# Altium PCB Upsilon_Bopit_Project.PcbDoc
Units mil, origin at the board's own origin, x right, y up, seen from the top; angles counter-clockwise.
Board outline 3000 x 3010 mil, 2 copper layers (Top Layer, Bottom Layer); 25 components, 19 nets, 91 pads, 1 vias.
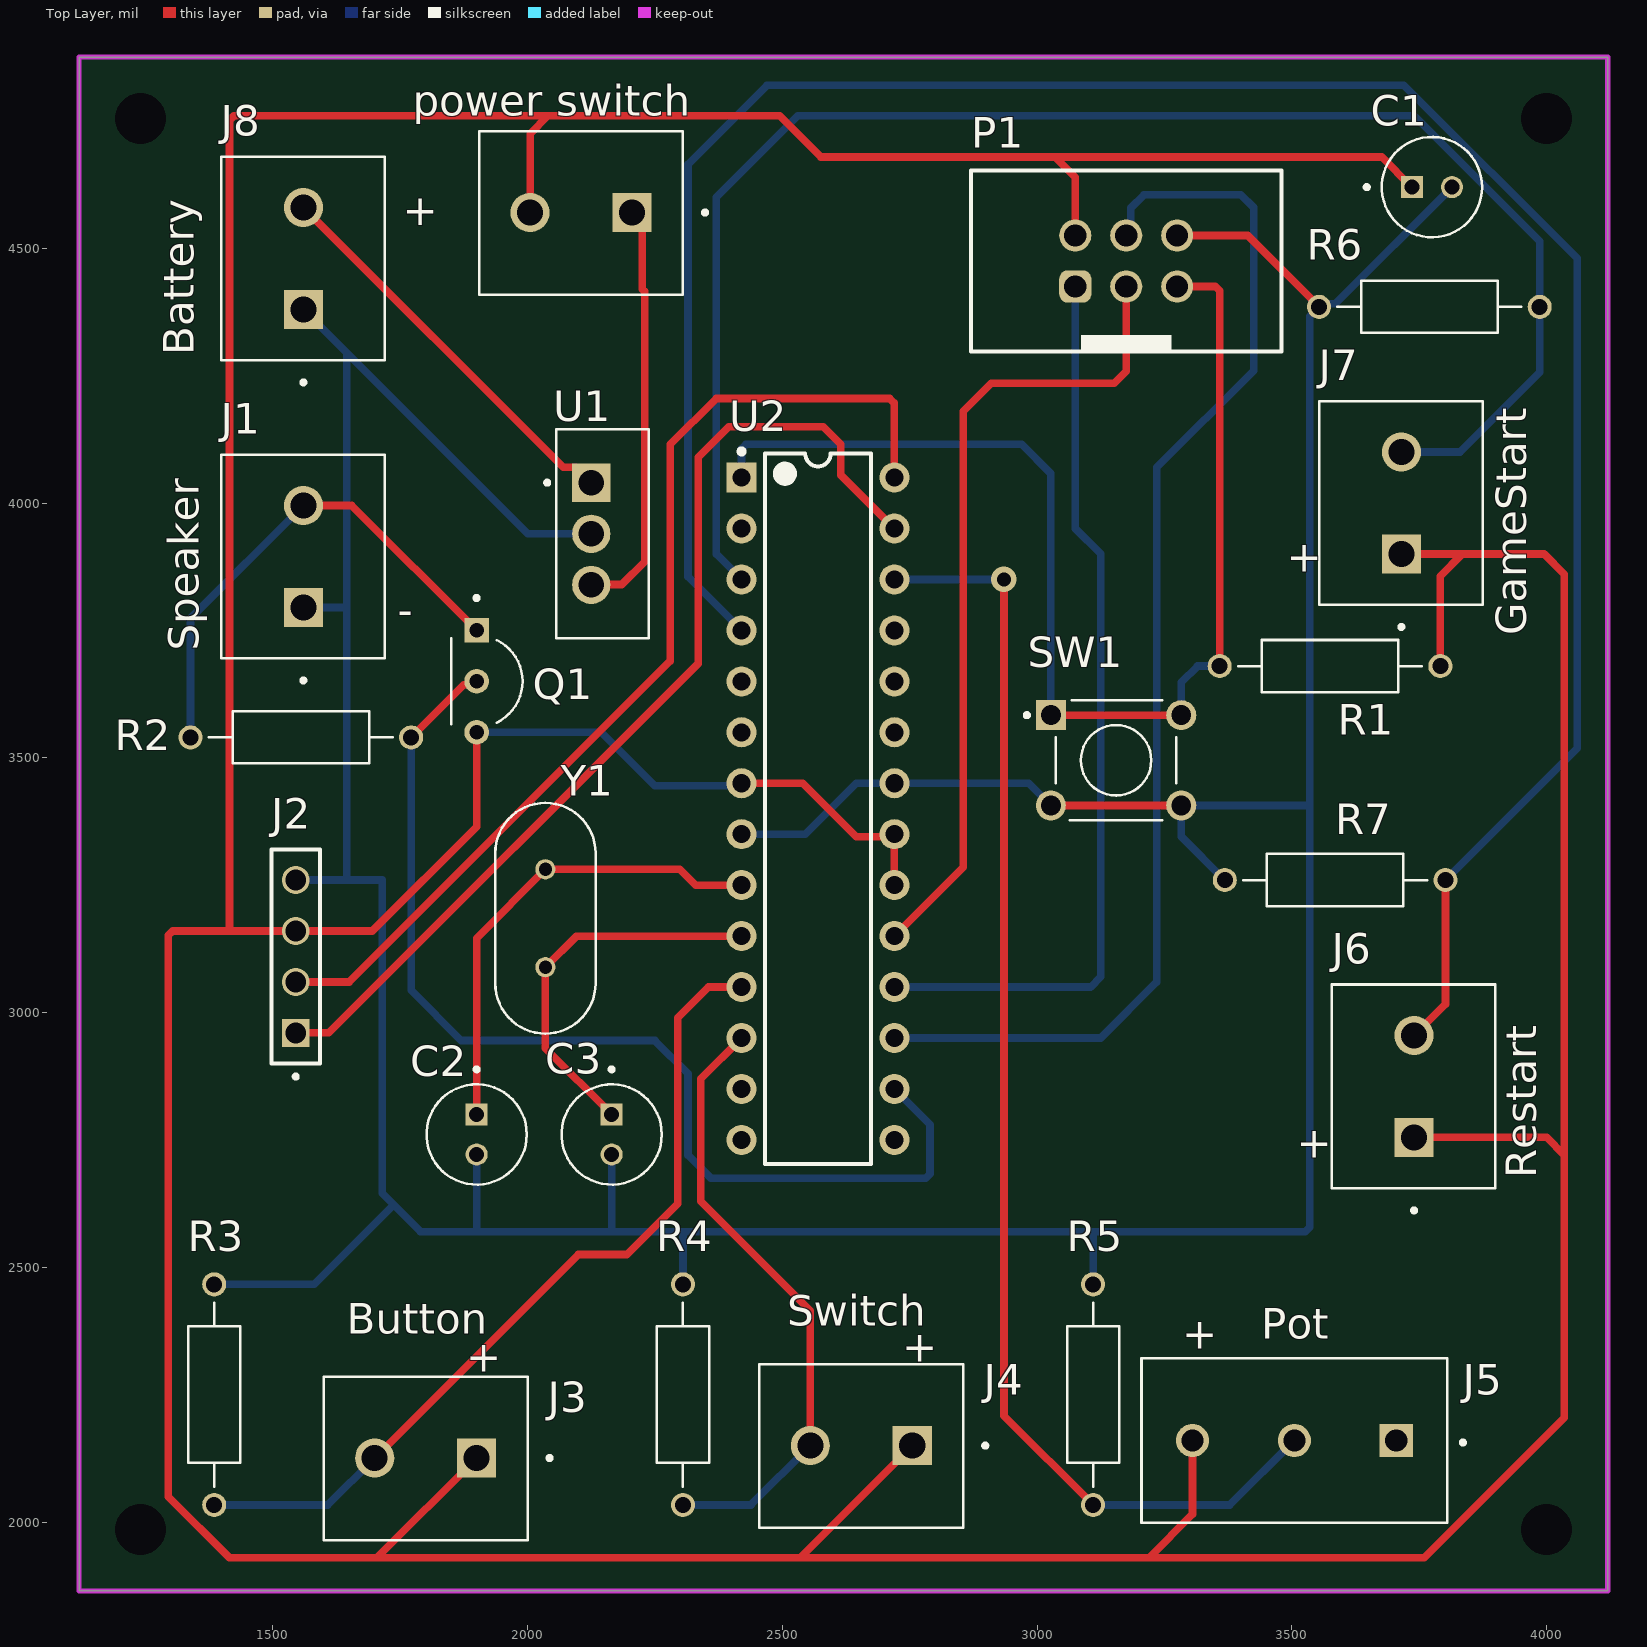
[diagram p0: Top Layer view]
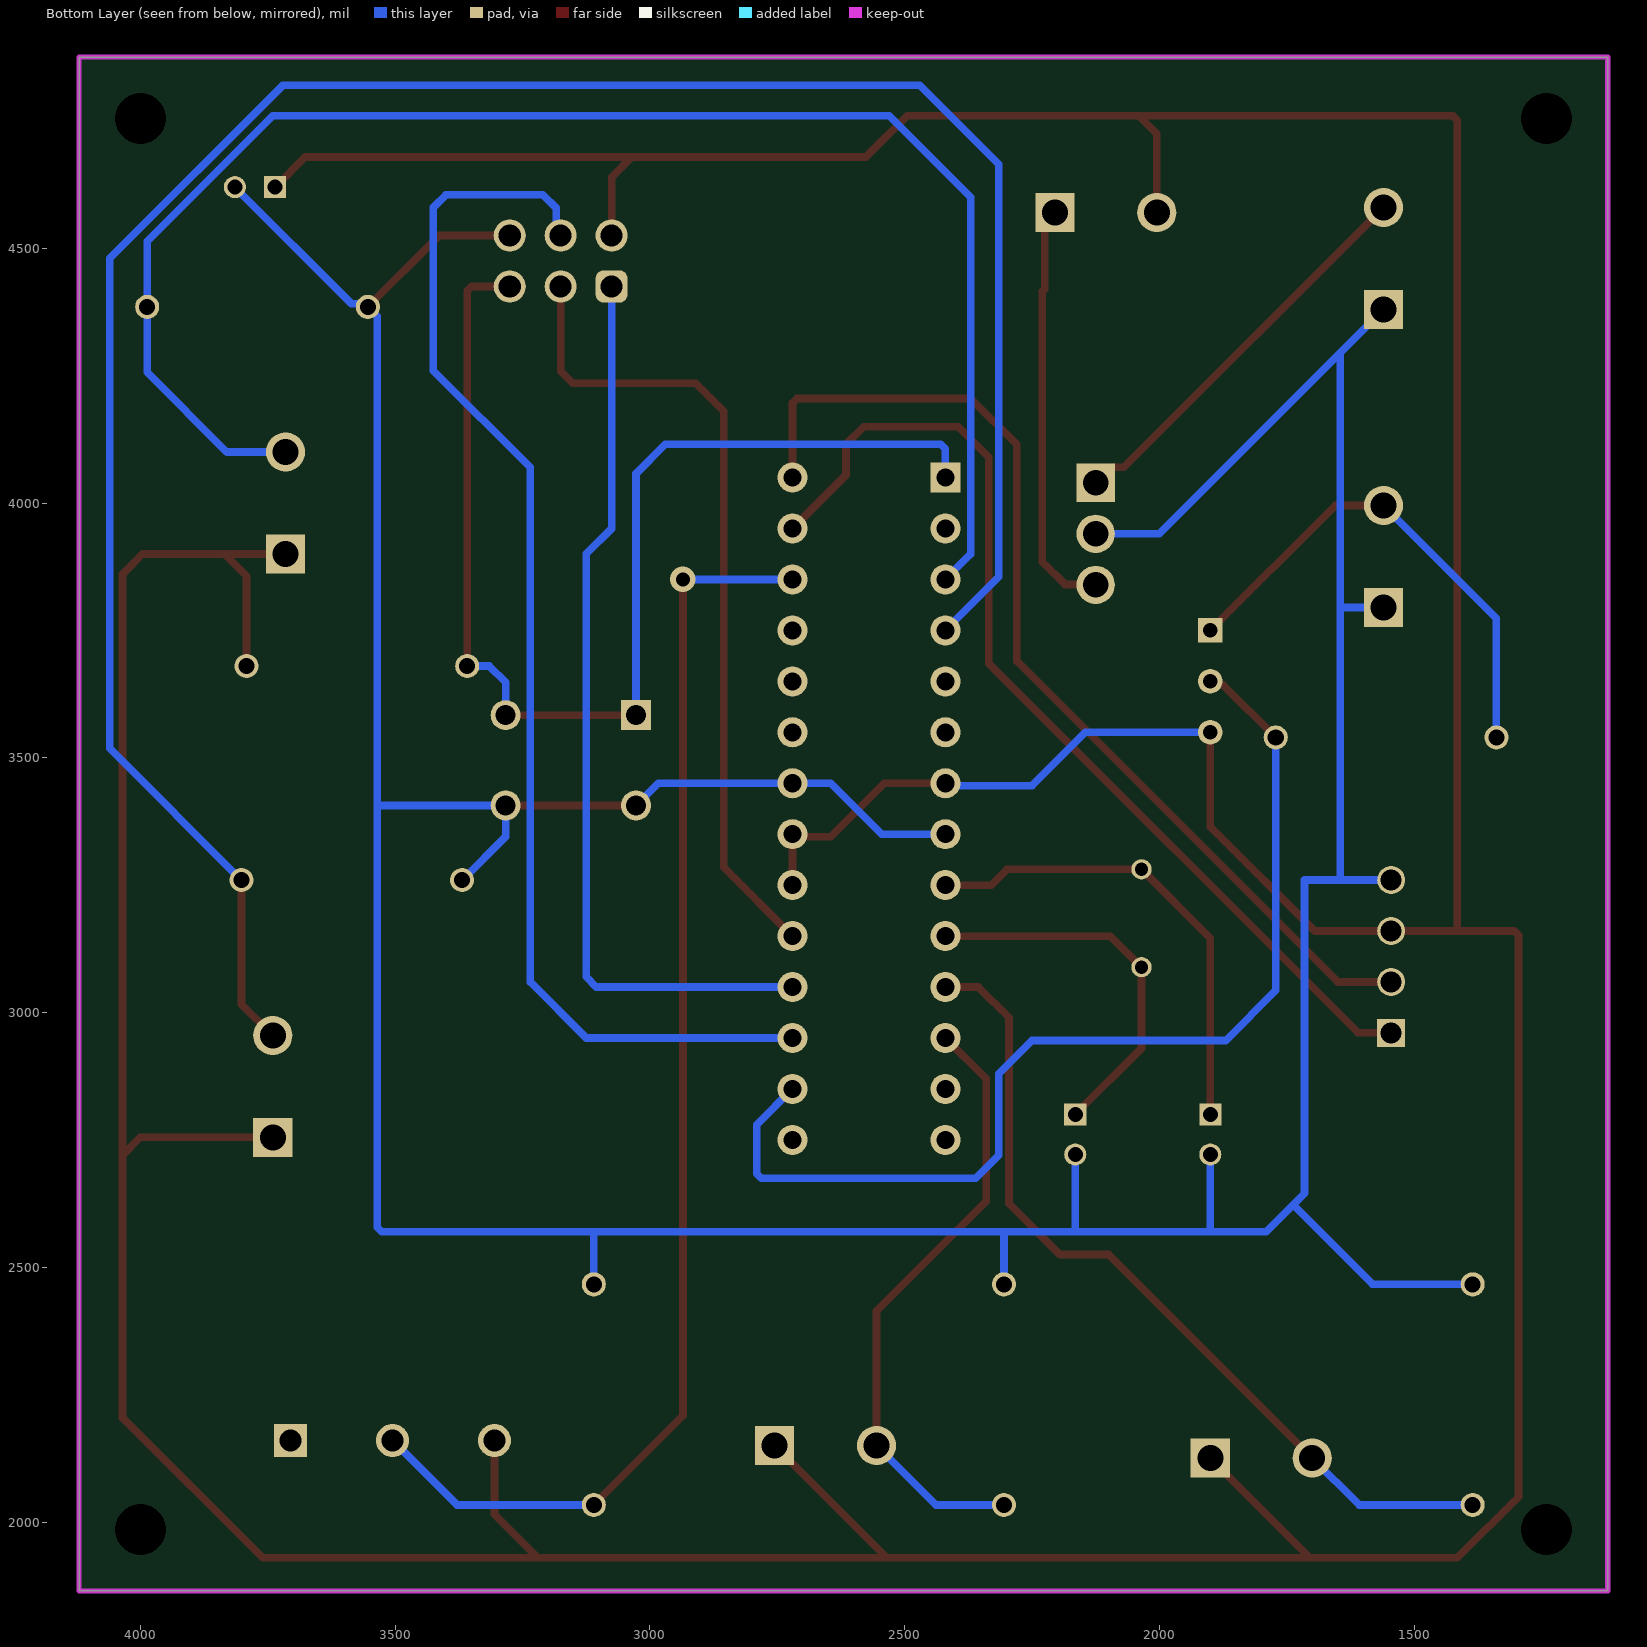
[diagram p1: Bottom Layer view, seen from below]
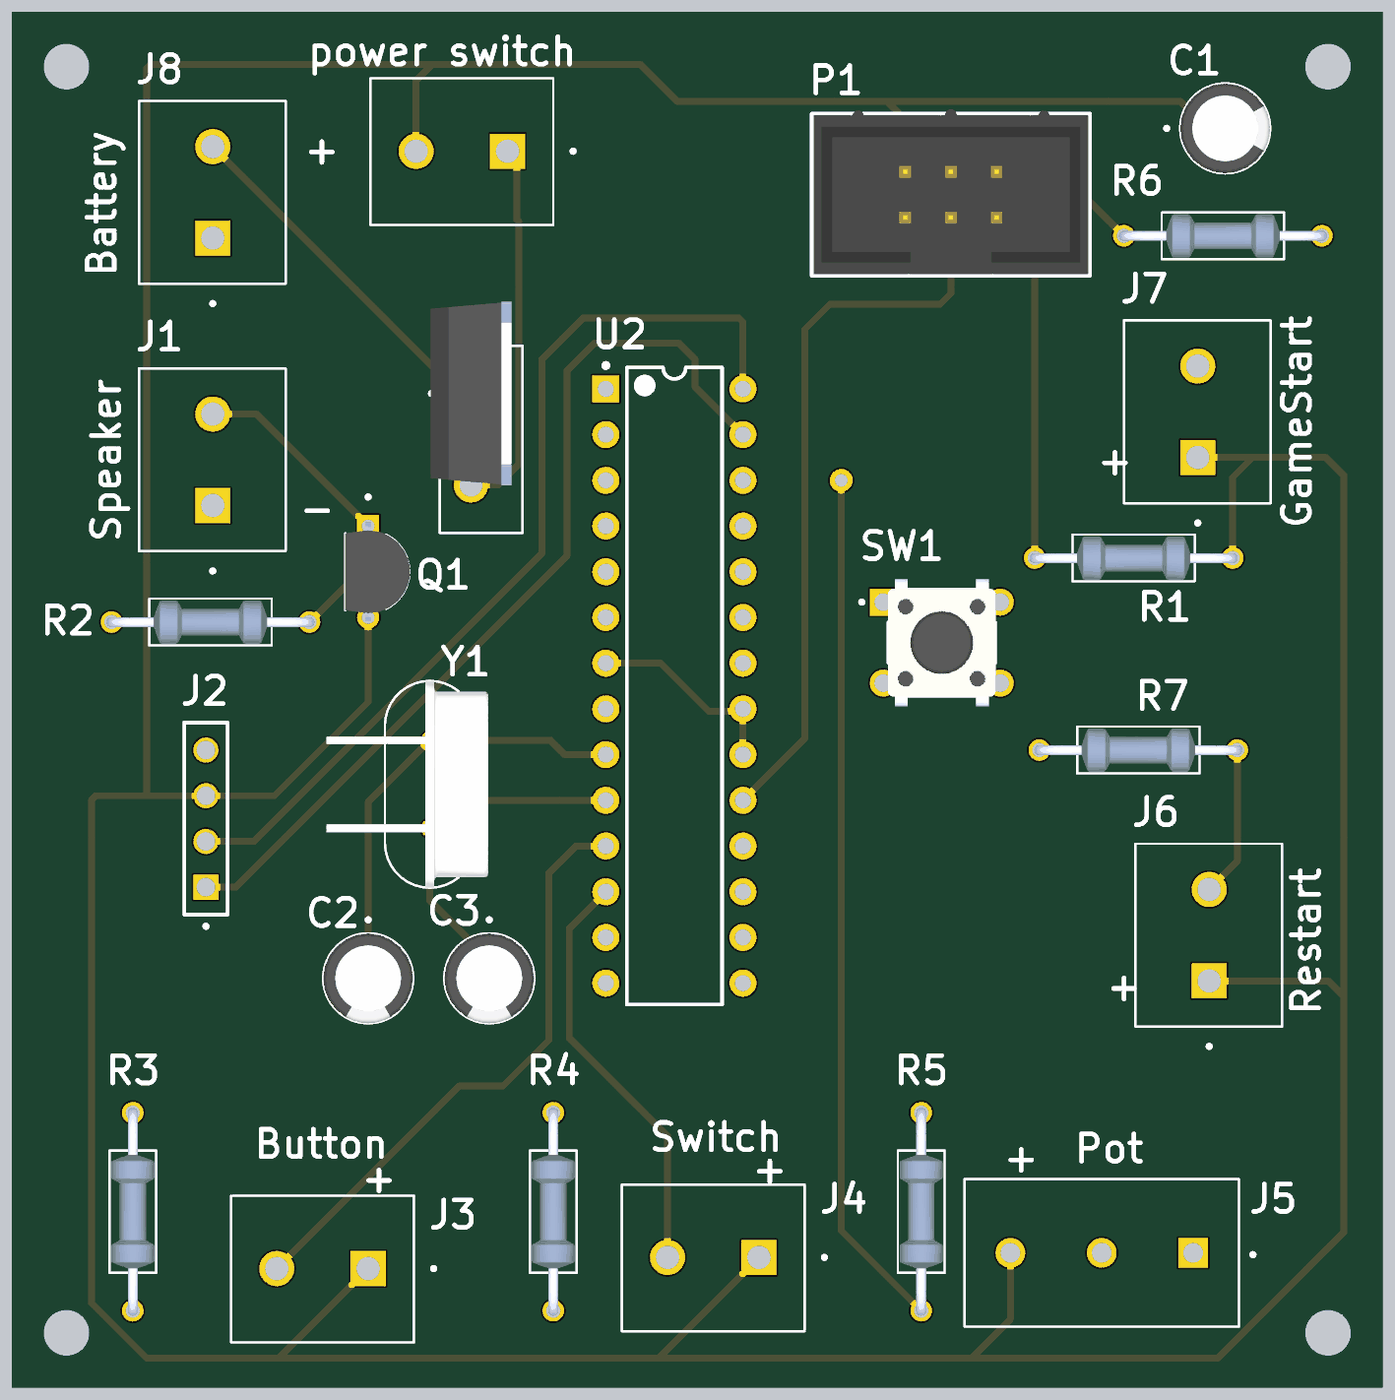
[diagram p2: 3D render of the assembled board from above, using the file's embedded part models]

## Layer stack, top to bottom
Top Solder: solder mask 0.4, Solder Resist, Dk 3.5
Top Layer: signal copper 1.4
Dielectric 1: dielectric 12.6, FR-4, Dk 4.8
Bottom Layer: signal copper 1.4
Bottom Solder: solder mask 0.4, Solder Resist, Dk 3.5

## Board outline
1120,1865 1120,4875 4120,4875 4120,1865

## Design rules (kind name [scope] priority, off if disabled: settings)
BoardOutlineClearance [All] p1: gap=7.87 ignorepadtopadclearanceinfootprint=FALSE except(15.75: Arc-SplitBarrior Arc-SplitContinuation Track-SplitBarrior Track-SplitContinuation SMDPad-SplitBarrior SMDPad-SplitContinuation THPad-SplitBarrior THPad-SplitContinuation Via-SplitBarrior Via-SplitContinuation Fill-SplitBarrior Fill-SplitContinuation Poly-SplitBarrior Poly-SplitContinuation Region-SplitBarrior Region-SplitContinuation Text-SplitBarrior Text-SplitContinuation)
Clearance "Clearance Bottom Layer" [OnLayer('Bottom Layer')] p1: gap=8 ignorepadtopadclearanceinfootprint=TRUE except(10: Arc-Text Track-Text SMDPad-Text THPad-Text Via-Text Fill-Text Poly-Text Region-Text Text-Text)
Clearance "Clearance Top Layer" [OnLayer('Top Layer')] p2: gap=8 ignorepadtopadclearanceinfootprint=TRUE except(10: Arc-Text Track-Text SMDPad-Text THPad-Text Via-Text Fill-Text Poly-Text Region-Text Text-Text)
Clearance [All] p3: gap=7.87 ignorepadtopadclearanceinfootprint=FALSE except(3.5: Arc-Arc Arc-Track Arc-SMDPad Track-Track Track-SMDPad SMDPad-SMDPad; 5: Arc-Via Track-Via SMDPad-Via THPad-Via Via-Via; 10: Arc-Text Track-Text SMDPad-Text THPad-Text Via-Text Fill-Text Poly-Text Region-Text Text-Text)
HoleSize [All] p1: absolutevalues=TRUE maxlimit=248.03 minlimit=7.87 maxpercent=80.000 minpercent=20.000
MinimumAnnularRing [All] p1: minimumring=3
MinimumSolderMaskSliver [All] p1: minsoldermaskwidth=3.94
PolygonConnect PolygonConnect_1 [All] p1: thpad.connectstyle=Relief thpad.reliefconductorwidth=20 thpad.reliefentries=4 thpad.polygonreliefangle="90 Angle" thpad.airgapwidth=10 smdpad.connectstyle=Relief smdpad.reliefconductorwidth=20 smdpad.reliefentries=4 smdpad.polygonreliefangle="90 Angle" smdpad.airgapwidth=10 via.connectstyle=Direct via.reliefconductorwidth=20 via.reliefentries=4 via.polygonreliefangle="90 Angle" via.airgapwidth=10
RoutingCorners [All] p1: cornerstyle=Round minsetback=100 maxsetback=100
RoutingVias [All] p1: holewidth=19.68 width=39.37 viastyle="Through Hole" minholewidth=7.87 minwidth=17.72 maxholewidth=39.37 maxwidth=78.74
SilkToSilkClearance [All] p1: silktosilkclearance=3.94
SilkToSolderMaskClearance [IsPad] p1: minsilkscreentomaskgap=3.94 clearancetoexposedcopper=TRUE
SolderMaskExpansion [All] p1: expansion=4 istentingtop=FALSE
SupplyNets "Schematic Supply Nets_2" [InNet('GND')] p1: voltage=0.000
SupplyNets "Schematic Supply Nets_1" [InNet('+5')] p2: voltage=0.000
SupplyNets "Schematic Supply Nets" [InNet('VCC')] p3: voltage=0.000
Width [All] p1: maxlimit=100 minlimit=3.5 preferedwidth=15
25 further rules are at their usual default settings.

## Components (designator, comment, footprint, x,y, rotation, side; value= is the part's Value field where it differs from the comment)
C1 "ECA1JHG100" CAPPRD200W50D500H1100 3775,4620 r0 top
C2 "ECA1JHG100" CAPPRD200W50D500H1100 1900,2760.63 r270 top
C3 "ECA1JHG100" CAPPRD200W50D500H1100 2165,2760.63 r270 top
J1 "1729128" PHOENIX_1729128 1719.45,3695 r90 top
J2 "SSW-104-02-T-S" SAMTEC_SSW-104-02-T-S 1545,2960 r90 top
J3 "1729128" PHOENIX_1729128 2000,2285 r180 top
J4 "1729128" PHOENIX_1729128 2855,2309.45 r180 top
J5 "282837-3" TE_282837-3 3505,2160 r180 top
J6 "1729128" PHOENIX_1729128 3899.45,2655 r90 top
J7 "1729128" PHOENIX_1729128 3874.45,3800 r90 top
J8 "1729128" PHOENIX_1729128 1719.45,4280 r90 top
P1 "61200621621" 61200621621 3175,4475 r0 top
"power switch" "1729128" PHOENIX_1729128 2305,4729.45 r180 top
Q1 "2N7000" TO92254P458H750-3 1900,3650 r270 top
R1 "MFR-25FRF52-10K" RESAD1100W55L680D260 3575,3680 r0 top
R2 "MFR-25FRF52-10K" RESAD1100W55L680D260 1555,3540 r180 top
R3 "MFR-25FRF52-10K" RESAD1100W55L680D260 1385,2250 r90 top
R4 "MFR-25FRF52-10K" RESAD1100W55L680D260 2305,2250 r90 top
R5 "MFR-25FRF52-10K" RESAD1100W55L680D260 3110,2250 r90 top
R6 "MFR-25FRF52-10K" RESAD1100W55L680D260 3770,4385 r180 top
R7 "MFR-25FRF52-10K" RESAD1100W55L680D260 3585,3260 r180 top
SW1 "1825910-6" SW_1825910-6-4 3155,3495 r0 top
U1 "L7805CV" TO255P1040X460X1968-3 2125,4040 r270 top
U2 "ATmega328-PU" 28P3 2570,3400 r0 top
Y1 "ABL-10.000MHZ-B2" XTAL_HC49P488W46L1150T500H350 2035,3185 r90 top

## Footprints (in the part's own frame and the unit in brackets; to place one, negate y for a bottom-side part, rotate by r counter-clockwise, add the part's x,y. Pads: shape width x height; smd on the part's side, far side on the other; paste and mask are expansions set on the pad)
28P3 [mm] "28-Pin Plastic Dual In-Line Package (PDIP)"
  rect 1.5x1.5 hole 0.9: 1(-3.81,16.51)
  round 1.5 hole 0.9: 2(-3.81,13.97) 3(-3.81,11.43) 4(-3.81,8.89) 5(-3.81,6.35) 6(-3.81,3.81) 7(-3.81,1.27) 8(-3.81,-1.27) 9(-3.81,-3.81) 10(-3.81,-6.35) 11(-3.81,-8.89) 12(-3.81,-11.43) 13(-3.81,-13.97) 14(-3.81,-16.51) 15(3.81,-16.51) 16(3.81,-13.97) 17(3.81,-11.43) 18(3.81,-8.89) 19(3.81,-6.35) 20(3.81,-3.81) 21(3.81,-1.27) 22(3.81,1.27) 23(3.81,3.81) 24(3.81,6.35) 25(3.81,8.89) 26(3.81,11.43) 27(3.81,13.97) 28(3.81,16.51)
  silkscreen extent -3.93,-17.7 2.65,17.93, body extent -3.6,-17.65 3.6,17.65, height 4.58
61200621621 [mm] "6 pins, straight, gold plating"
  rrect50% 1.6x1.6 hole 1.1: 1(-2.54,-1.27)
  round 1.6 hole 1.1: 2(-2.54,1.27) 3(0,-1.27) 4(0,1.27) 5(2.54,-1.27) 6(2.54,1.27)
  silkscreen extent -7.74,-4.5 7.74,4.5, body extent -7.64,-4.43 7.64,4.75, height 9.13
CAPPRD200W50D500H1100 [mm]
  round 1.1 hole 0.75: N(1,0)
  rect 1.1x1.1 hole 0.75: P(-1,0)
  silkscreen extent -3.35,-2.5 2.5,2.5, body extent -2.5,-2.5 2.5,2.5, height 11
PHOENIX_1729128 [mm]
  rect 1.95x1.95 / inner round 1.95 / far side rect 1.95x1.95 hole 1.3: 1(2.54,4.05)
  round 1.95 hole 1.3: 2(7.62,4.05)
  silkscreen extent -1.2,0 10.16,8.15
RESAD1100W55L680D260 [mm]
  round 1.2 hole 0.8: 1(-5.5,0) 2(5.5,0)
  silkscreen extent -4.58,-1.3 4.58,1.3, body extent -5.77,-1.2 5.77,1.2, height 2.4
SAMTEC_SSW-104-02-T-S [mm]
  rect 1.39x1.39 hole 1.04: 01(0,0)
  round 1.39 hole 1.04: 02(2.54,0) 03(5.08,0) 04(7.62,0)
  silkscreen extent -2.27,-1.21 9.15,1.21
SW_1825910-6-4 [mm]
  rect 1.498x1.498 / inner round 1.498 / far side rect 1.498x1.498 hole 0.99: 1(-3.25,2.25)
  round 1.498 hole 0.99: 2(3.25,2.25) 3(-3.25,-2.25) 4(3.25,-2.25)
  silkscreen extent -4.54,-3 3,3, body extent -3,-3.9 3,3.9, height 5.01
TE_282837-3 [mm]
  rect 1.65x1.65 hole 1.1: 1(-5.08,0)
  round 1.65 hole 1.1: 2(0,0) 3(5.08,0)
  silkscreen extent -8.5,-4.1 7.62,4.1
TO255P1040X460X1968-3 [mm]
  rect 1.91x1.91 / inner round 1.91 / far side rect 1.91x1.91 hole 1.27: 1(0,0)
  round 1.91 hole 1.27: 2(2.55,0) 3(5.1,0)
  silkscreen extent -2.65,-2.29 7.75,2.86, body extent -5.1,-2.25 5.1,2.25, height 19.68
TO92254P458H750-3 [mm]
  rect 1.228x1.228 / inner round 1.228 / far side rect 1.228x1.228 hole 0.72: 1(-2.54,0)
  round 1.228 hole 0.72: 2(0,0) 3(2.54,0)
  silkscreen extent -4.25,-1.27 2.13,2.29, body extent -2.74,-1.27 2.74,2.33, height 8.09
XTAL_HC49P488W46L1150T500H350 [mm]
  round 1.007 hole 0.657: 1(-2.44,0) 2(2.44,0)
  silkscreen extent -5.75,-2.5 5.75,2.5, body extent -5.75,-3.25 5.75,5.75, height 2.5

## Part data
C1 C2 C3: "NHG-A", Package="RADIAL-2 Panasonic", Availability="No availability data", Check_prices=https://www.snapeda.com/parts/ECA1JHG100/Panasonic/view-part/5791065/?ref=eda, MF=Panasonic, MP=ECA1JHG100, Price=None, SnapEDA_Link=https://www.snapeda.com/parts/ECA1JHG100/Panasonic/view-part/5791065/?ref=snap
J1 J3 J4 J6 J7 J8 "power switch": "PCB Terminal Screw 5.08mm 16AWG 400V 13.5A 2 Position COMBICON MKDSN Series", Package=None, Check_prices=https://www.snapeda.com/parts/1729128/Phoenix+Contact/view-part/?ref=eda, MF="Phoenix Contact", MP=1729128, SnapEDA_Link=https://www.snapeda.com/parts/1729128/Phoenix+Contact/view-part/?ref=snap
J2: Package=None, Availability=Unavailable, MF="Samtec Inc.", MP=SSW-104-02-T-S, Price=None
J5: "TERMI-BLOK PCB MOUNT 3P", Package=None, Availability=Unavailable, MP=282837-3, Price=None
P1: "WR-BHD Male Box Header, THT Straight, pitch 2.54mm, 2 row, 6 pin", Contact Resistance=20mOhm, Insulation Resistance=1000MOhm, Manufacturer="Wurth Elektronik", Operating Temperature Max=105°C, Operating Temperature Min=-40°C, Rated Current=3A, Withstanding Voltage=500V, Working Voltage=250V, Category="Wire-to-Board Connectors", ComponentLink1Description="Website Link", ComponentLink1URL=https://www.we-online.com/redexpert/article/61200621621?ad, ComponentLink2Description="Datasheet Link", ComponentLink2URL=https://www.we-online.com/redexpert/spec/61200621621?ad, Gender=Male, Height=9.1mm, Length=15.28mm, Manufacturer Part Number=61200621621, Match Code=WR-BHD, Mount="Through Hole", Number of Pins=6, Number of Rows=2, Orientation=Straight, Packaging=Tray, Pitch=2.54mm, Width=9.1mm
Q1: "N-Channel 60 V 200mA (Ta) Through Hole TO-92", Package="TO-226-3 NTE Electronics, Inc.", Check_prices=https://www.snapeda.com/parts/2N7000/NTE+Electronics/view-part/?ref=eda, MF="NTE Electronics, Inc.", MP=2N7000, SnapEDA_Link=https://www.snapeda.com/parts/2N7000/NTE+Electronics/view-part/?ref=snap
R1 R2 R3 R4 R5 R6 R7: "10.5 kOhms Â±1% 0.25W, 1/4W Through Hole Resistor Axial - Metal Film", Package="RADIAL-2 YAGEO", Check_prices=https://www.snapeda.com/parts/MFR-25FRF52-10K/Yageo/view-part/?ref=eda, MF=Yageo, MP=MFR-25FRF52-10K, SnapEDA_Link=https://www.snapeda.com/parts/MFR-25FRF52-10K/Yageo/view-part/?ref=snap
SW1: "Switch Push Button OFF (ON) SPST Round Button 0.05A 24VDC Momentary Contact PC Pins Thru-Hole", Package=None, Check_prices=https://www.snapeda.com/parts/1825910-6/TE+Connectivity+ALCOSWITCH+Switches/view-part/?ref=eda, Digi-Key_Part_Number=450-1650-ND, MF="TE Connectivity", MP=1825910-6, Purchase-URL=https://pricing.snapeda.com/search/part/1825910-6/?ref=eda, SnapEDA_Link=https://www.snapeda.com/parts/1825910-6/TE+Connectivity+ALCOSWITCH+Switches/view-part/?ref=snap
U1: "Linear Voltage Regulator IC Positive Fixed 1 Output 1.5A TO-220", Package="TO-220-3 STMicroelectronics", Check_prices=https://www.snapeda.com/parts/L7805CV/STMicroelectronics/view-part/?ref=eda, MF=STMicroelectronics, MP=L7805CV, SnapEDA_Link=https://www.snapeda.com/parts/L7805CV/STMicroelectronics/view-part/?ref=snap
U2: library part CMP-0095-00015-2, "8-bit AVR Microcontroller, 32KB Flash, 1KB EEPROM, 2KB SRAM, 28-pin PDIP, Industrial Grade (-40°C to 85°C)", ComponentLink1Description="Manufacturer URL", ComponentLink1URL=http://www.atmel.com/, ComponentLink2Description="ATmega48A/48PA/88A/88PA/168A/168PA/328/328P Datasheet", ComponentLink2URL=http://www.atmel.com/dyn/resources/prod_documents/8271.pdf, ComponentLink3Description="ATmega48A/48PA/88A/88PA/168A/168PA/328/328P Summary", ComponentLink3URL=http://www.atmel.com/dyn/resources/prod_documents/8271S.pdf, DatasheetVersion="revD, May-2011", PackageDescription="28-lead (0.300\"/7.62mm Wide) Plastic Dual Inline Package (PDIP)", PackageReference=28P3, PackageVersion="revB, Sep-2001", RevisionNote="DatasheetVersion updated. URLs added."
Y1: "HC/49US (AT49) MICROPROCESSOR CRYSTAL", Package=None, Availability="In Stock", Check_prices=https://www.snapeda.com/parts/ABL-10.000MHZ-B2/Abracon+LLC/view-part/?ref=eda, MF="Abracon LLC", MP=ABL-10.000MHZ-B2, Price=None, Purchase-URL=https://pricing.snapeda.com/search/part/ABL-10.000MHZ-B2/?ref=eda, SnapEDA_Link=https://www.snapeda.com/parts/ABL-10.000MHZ-B2/Abracon+LLC/view-part/?ref=snap

## Free pads (board coordinates)
  round 60 hole 100 unplated: 2(1240,1985) 3(1240,4755) 4(4000,4755) 5(4000,1985)

## Via types
v1: diameter 50, hole 28, Top Layer to Bottom Layer, 1 vias

## Nets (pads, with @x,y where several pads share a name; then routed paths per layer and width w, separated by ;. In a path a pad name is that pad's centre, name@x,y a point inside that pad or via, vN(x,y) a via of type N, cw(c..) or ccw(c..) an arc to the next point about the centre after c; other vN are vias at no path point)
+5: "power switch.2" C1.P J2.03 J3.1 J4.1 J5.3 J6.1 J7.1 P1.2 Q1.3 R1.2 U2.7 U2.20 U2.21 | length 13635.2
  Top Layer w15: J3.1 1704.45,1930 ; Q1.3 1900,3365 1695,3160 J2.03 1415,3160 ; 2005,4570 2005,4725 2040,4760 ; U2.7 2540,3450 2645,3345 2715,3345 U2.21 U2.20 ; J4.1 2535,1930 ; P1.2 3075,4639.24 3035,4679.24 ; J5.3 3305,2015 3220,1930 ; J7.1 3835,3900 ; C1.P 3676.39,4679.24 3035,4679.24 ; J6.1 4000,2755 4035,2720 ; R1.2 3791.54,3856.54 3835,3900 ; 1415,3160 1303.79,3160 1295,3151.21 1295,2050 1415,1930 1704.45,1930 ; 1415,3160 1415,4751.21 1423.79,4760 2040,4760 ; 1704.45,1930 2535,1930 ; 2040,4760 2495,4760 2575.76,4679.24 3035,4679.24 ; 2535,1930 3220,1930 ; 3220,1930 3760,1930 4035,2205 4035,2720 ; 3835,3900 3995,3900 4035,3860 4035,2720
  Bottom Layer w15: Q1.3 2145,3550 2250,3445 2415,3445 U2.7
GND: C1.N C2.N C3.N J1.1 J2.04 J8.1 P1.6 R3.2 R4.2 R5.2 R6.2 R7.2 SW1.3 SW1.4 U1.2 U2.8 U2.22 | length 9301.2
  Top Layer w15: SW1.3 SW1.4 ; P1.6 3413.46,4525 R6.2
  Bottom Layer w15: R3.2 1581.54,2466.54 1737.5,2622.5 ; J2.04 1645,3260 ; J1.1 1640,3795 1645,3790 ; J8.1 1645,4295 ; C2.N 1900,2570 ; U1.2 2000.39,3939.61 1645,4295 ; C3.N 2165,2570 ; R4.2 2305,2570 ; U2.8 2545,3350 2645,3450 U2.22 2983.46,3450 SW1.3 ; R5.2 3110,2570 ; R7.2 3282.95,3345.51 SW1.4 3533.58,3406.42 3535,3405 ; C1.N 3585.54,4391.17 3559.63,4391.17 R6.2 3535,4366.54 3535,3405 ; 1645,3260 1645,3790 ; 1645,3260 1715,3260 1715,2645 1737.5,2622.5 ; 1645,3790 1645,4295 ; 1737.5,2622.5 1790,2570 1900,2570 ; 1900,2570 2165,2570 ; 2165,2570 2305,2570 ; 2305,2570 3110,2570 ; 3110,2570 3526.21,2570 3535,2578.79 3535,3405
NetC2_P: C2.P U2.9 Y1.2 | length 946.3
  Top Layer w15: C2.P 1900,3146.06 Y1.2 2298.94,3281.06 2330,3250 U2.9 U2.9@2408.55,3250
NetC3_P: C3.P U2.10 Y1.1 | length 753.1
  Top Layer w15: C3.P 2035,2930 Y1.1 2096.06,3150 U2.10
NetJ1_2: J1.2 Q1.1 R2.2 | length 988.2
  Top Layer w15: J1.2 1655,3995 Q1.1
  Bottom Layer w15: R2.2 1338.46,3773.46 J1.2
NetJ2_01: J2.01 U2.27 | length 2023.1
  Top Layer w15: J2.01 1610,2960 2335,3685 2335,4090 2395,4150 2580,4150 2615,4115 2615,4055 U2.27
NetJ2_02: J2.02 U2.28 | length 2048.1
  Top Layer w15: J2.02 1650,3060 2280,3690 2280,4115 2370,4205 2711.21,4205 2720,4196.21 U2.28
NetJ3_2: J3.2 R3.1 U2.11 | length 1669.9
  Top Layer w15: J3.2 2099.45,2525 2195,2525 2295,2625 2295,2990 2355,3050 U2.11
  Bottom Layer w15: R3.1 1607.91,2033.46 J3.2
NetJ4_2: J4.2 R4.1 U2.12 | length 1220.5
  Top Layer w15: U2.12 2340,2870 2340,2630 2555,2415 J4.2
  Bottom Layer w15: R4.1 2438.46,2033.46 J4.2
NetJ5_2: J5.2 R5.1 U2.26 | length 2551.4
  Top Layer w15: v1(2935,3850) 2935,2208.46 R5.1
  Bottom Layer w15: U2.26 v1(2935,3850) ; R5.1 3378.46,2033.46 J5.2
NetJ6_2: J6.2 R7.1 U2.4 | length 4566.1
  Top Layer w15: J6.2 3801.54,3016.54 R7.1
  Bottom Layer w15: U2.4 2315,3855 2315,4665 2470,4820 3720,4820 4060,4480 4060,3518.46 R7.1
NetJ7_2: J7.2 R6.1 U2.3 | length 3148.9
  Bottom Layer w15: U2.3 2370,3900 2370,4600 2530,4760 3740,4760 3986.54,4513.46 R6.1 3986.54,4256.54 3830,4100 J7.2
NetP1_1: P1.1 U2.18 | length 1789
  Bottom Layer w15: U2.18 3105,3050 3125,3070 3125,3900 3075,3950 P1.1
NetP1_3: P1.3 U2.19 | length 1604.8
  Top Layer w15: U2.19 2855,3285 2855,4180 2910,4235 3151.21,4235 3175,4258.79 P1.3
NetP1_4: P1.4 U2.17 | length 2479.1
  Bottom Layer w15: U2.17 3125,2950 3235,3060 3235,4070 3425,4260 3425,4580 3400,4605 3210,4605 3184,4579 3184,4534 P1.4
NetP1_5: P1.5 R1.1 SW1.1 SW1.2 U2.1 | length 2428.4
  Top Layer w15: SW1.1@3049.04,3605.57 SW1.1 SW1.2 ; P1.5 3349.68,4425 3358.46,4416.21 R1.1
  Bottom Layer w15: U2.1 2420,4106.21 2428.79,4115 2970,4115 3027.05,4057.95 SW1.1 ; SW1.2 3282.95,3647.95 3315,3680 R1.1
"Netpower switch_1": "power switch.1" U1.3 | length 819.3
  Top Layer w15: U1.3 2125.89,3840.1 2185.1,3840.1 2230,3885 2230,4415 2225,4420 2225,4550 2205,4570
NetQ1_2: Q1.2 R2.1 U2.16 | length 2134.2
  Top Layer w15: R2.1 1875.15,3643.62 1893.62,3643.62 Q1.2
  Bottom Layer w15: R2.1 1771.54,3043.46 1870,2945 2250,2945 2315,2880 2315,2720 2360,2675 2781.21,2675 2790,2683.79 2790,2780 U2.16
VCC: J8.2 U1.1 | length 788.7
  Top Layer w15: J8.2 2069.9,4070.1 2094.9,4070.1 U1.1
pads on no net: J5.1 U2.2 U2.5 U2.6 U2.13 U2.14 U2.15 U2.23 U2.24 U2.25

## Keep-outs
Keep-Out Layer:
  the board outline again, w10

## Silkscreen, mask and mechanical layers (free items; w line width, h text height)
Top Overlay:
  text "+" at 1755,4545 h60
  text "Battery" at 1345.01,4290 h60 r90
  text "+" at 3490,3865 h60
  text "-" at 1745,3760.01 h60
  text "GameStart" at 3960,3740 h60 r90
  text "Speaker" at 1355.01,3710 h60 r90
  text "+" at 3510,2715 h60
  text "Restart" at 3980,2675 h60 r90
  text "Switch" at 2510,2385 h60
  text "Button" at 1645,2370 h60
  text "Pot" at 3440,2360 h60
  text "+" at 3285,2340 h60
  text "+" at 2735,2315 h60
  text "+" at 1880,2295 h60
Mechanical 1:
  lines w10: 1120,1865 4120,1865 4120,4875 1120,4875 1120,4865 1120,1865